# Altium PCB PCB.PcbDoc
Units mil, origin at the board's own origin, x right, y up, seen from the top; angles counter-clockwise.
Board outline 1320 x 535 mil, 2 copper layers (Top Layer, Bottom Layer); 13 components, 8 nets, 35 pads, 11 vias.
Unrouted connection lines stored in the file: 1.
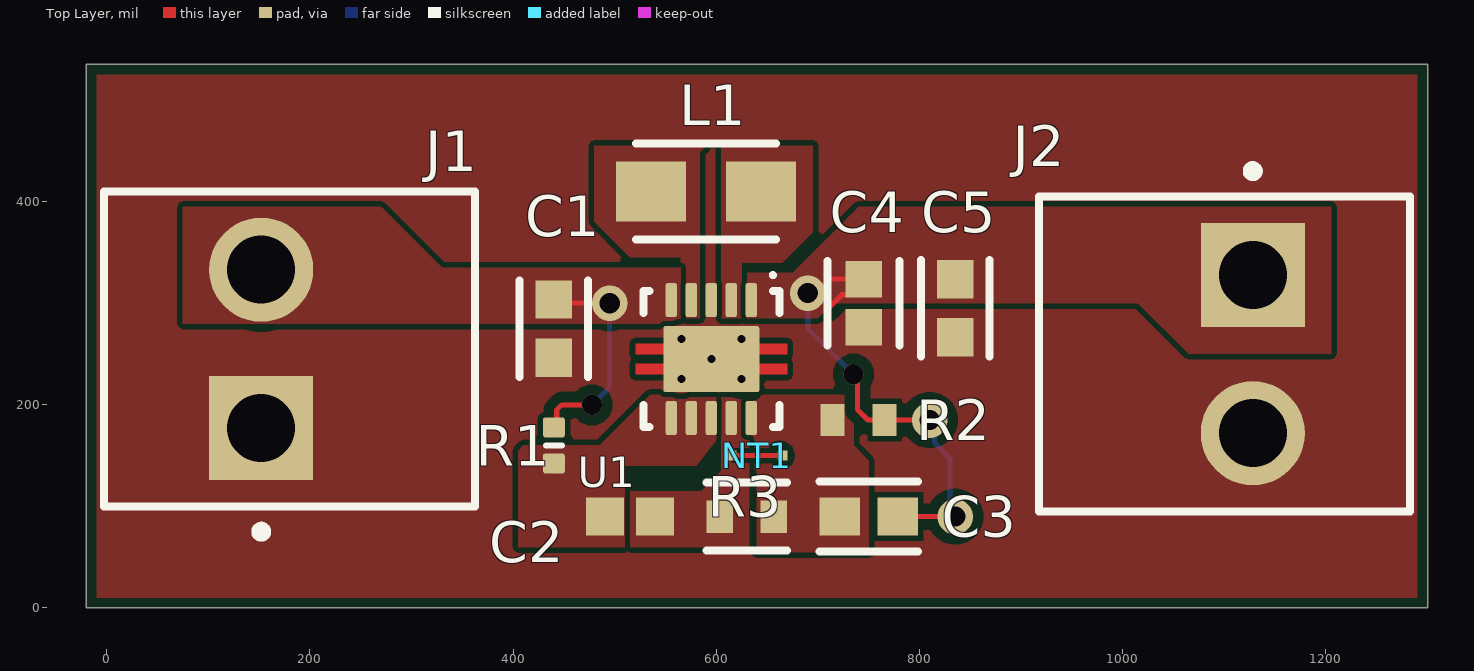
[diagram p0: Top Layer view]
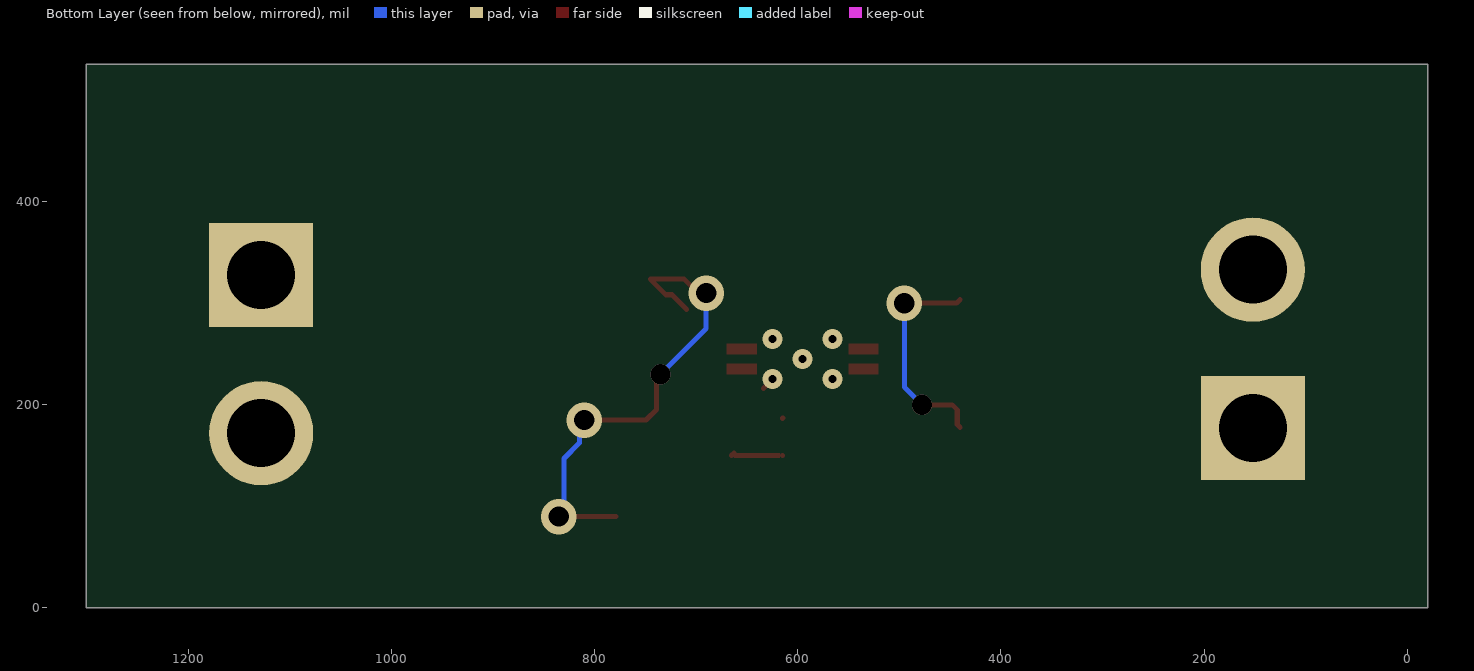
[diagram p1: Bottom Layer view, seen from below]
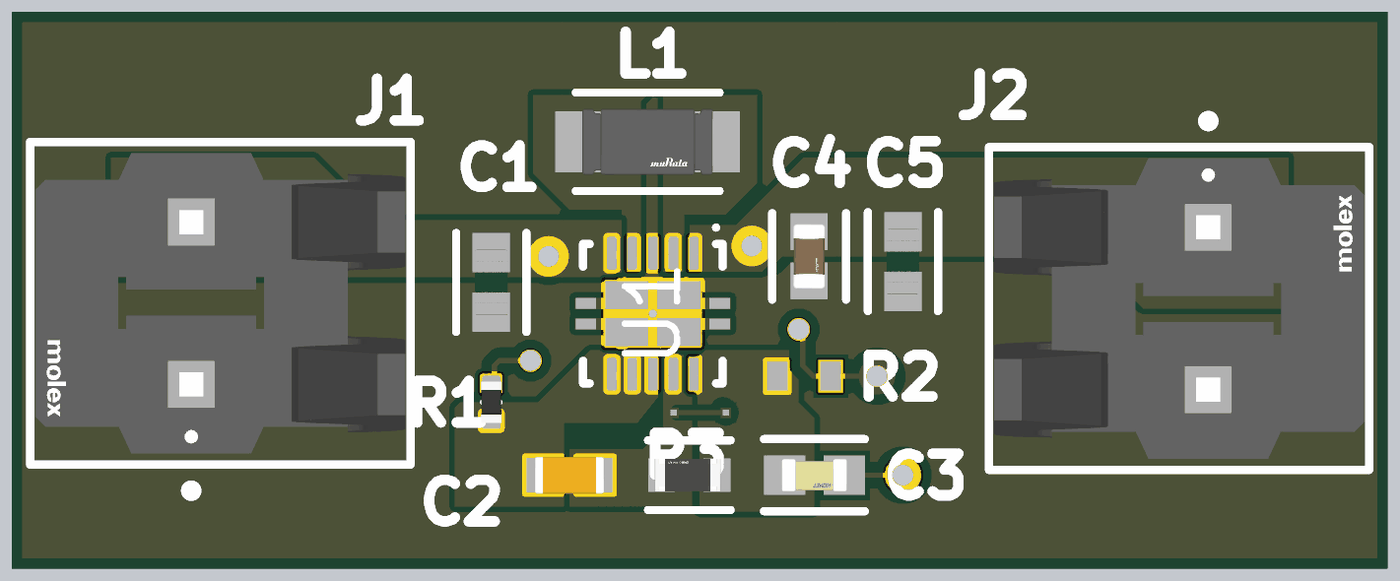
[diagram p2: 3D render of the assembled board from above, using the file's embedded part models]

## Layer stack, top to bottom
Top Solder: solder mask 0.4, Solder Resist, Dk 3.5
Top Layer: signal copper 1.4
Dielectric 1: dielectric 12.6, FR-4, Dk 4.8
Bottom Layer: signal copper 1.4
Bottom Solder: solder mask 0.4, Solder Resist, Dk 3.5

## Board outline
-20,0 1300,0 1300,535 -20,535

## Design rules (kind name [scope] priority, off if disabled: settings)
BoardOutlineClearance [All] p1: gap=9.84 ignorepadtopadclearanceinfootprint=FALSE
Clearance [All] p1: gap=10 ignorepadtopadclearanceinfootprint=FALSE except(0: Arc-Hole Track-Hole SMDPad-Hole THPad-Hole Via-Hole Fill-Hole Poly-Hole Region-Hole Text-Hole; 5: SMDPad-SMDPad SMDPad-Poly Fill-Poly Poly-Poly Poly-Region)
Clearance Clearance_Samenet [All] p2: gap=0 ignorepadtopadclearanceinfootprint=FALSE
MinimumSolderMaskSliver [All] p1: minsoldermaskwidth=2
PasteMaskExpansion [All] p1: expansion=-2
PolygonConnect [All] p1: connectstyle=Direct reliefconductorwidth=10 reliefentries=4 polygonreliefangle="90 Angle" airgapwidth=10
RoutingVias [All] p1: holewidth=20 width=35 viastyle="Through Hole" minholewidth=5 minwidth=15 maxholewidth=28 maxwidth=50
SilkToSilkClearance [All] p1: silktosilkclearance=0
SilkToSolderMaskClearance [IsPad] p1: minsilkscreentomaskgap=2 clearancetoexposedcopper=TRUE
SolderMaskExpansion [All] p1: expansion=2 istentingtop=FALSE
Width [All] p1: maxlimit=10 minlimit=5 preferedwidth=10
26 further rules are at their usual default settings.

## Components (designator, comment, footprint, x,y, rotation, side; value= is the part's Value field where it differs from the comment)
C1 "CL10A106MQ8NNNC" FP-CL10-IPC_B 440,275 r270 top value=10uF
C2 "Capacitor 100 nF +/-10% 50 V 0603" CAPC1608X90X40NL10T20 515,90 r0 top value=100nF
C3 "C0603C229C5GACTU" FP-C0603C-CF-IPC_B 750,90 r180 top value=2.2pF
C4 "GRM188R61A226ME15D" FP-GRM188-0_2-IPC_C 745,300 r270 top value=22uF
C5 "CL10A106MQ8NNNC" FP-CL10-IPC_B 835,295 r270 top value=10uF
J1 "26-48-1025" FP-26-48-1025-MFG 180,255 r270 top
J2 "26-48-1025" FP-26-48-1025-MFG 1100,250 r90 top
L1 "LQH31CN2R2M03L" FP-LQH31CN_03-MFG 590,410 r0 top value=2.2uH
NT1 "Net_tie" Net_tie-Footprint-1 640,150 r0 top net-tie
R1 "Resistor 100R +/-1 % 0402 63 mW" RESC0402(1005)_L 440,160 r270 top value=100
R2 "RC0603FR-071ML" RESC1608X55X25LL10T15 740,185 r0 top value=1MR
R3 "RT0603DRD07178KL" FP-RT0603-IPC_C 630,90 r180 top value=178kR
U1 "TPS63000DRCR" DRC0010J_V 595,245 r270 top

## Footprints (in the part's own frame and the unit in brackets; to place one, negate y for a bottom-side part, rotate by r counter-clockwise, add the part's x,y. Pads: shape width x height; smd on the part's side, far side on the other; paste and mask are expansions set on the pad)
CAPC1608X90X40NL10T20 [mm] "Chip Capacitor, 2-Leads, Body 1.70x0.90mm, IPC Medium Density"
  rect 0.95x0.95 smd: 1(-0.625,0) 2(0.625,0)
  body extent -0.85,-0.45 0.85,0.45, height 0.9
DRC0010J_V [mm] "SON, 10-Leads, Body 3x3mm, Pitch 0.5mm, Thermal Pad 2.4x1.65mm, TI Recommended"
  rrect36% 0.85x0.28 smd paste-0.025 mask+0.07: 1(-1.475,1) 2(-1.475,0.5) 3(-1.475,0) 4(-1.475,-0.5) 5(-1.475,-1) 6(1.475,-1) 7(1.475,-0.5) 8(1.475,0) 9(1.475,0.5) 10(1.475,1)
  rrect6% 1.65x2.4 smd paste-0.825 mask+0.07: 11(0,0)
  Top Layer region: -0.39,-1.9 -0.11,-1.9 -0.11,-1.143 -0.39,-1.143
  Top Layer region: 0.39,-1.143 0.11,-1.143 0.11,-1.9 0.39,-1.9
  Top Layer region: 0.39,1.9 0.11,1.9 0.11,1.143 0.39,1.143
  Top Layer region: -0.39,1.143 -0.11,1.143 -0.11,1.9 -0.39,1.9
  silkscreen extent -2.15,-1.7 1.7,1.7, body extent -1.55,-1.55 1.55,1.55, height 1
FP-26-48-1025-MFG [mm]
  rect 2.6x2.6 hole 1.7 paste-1000 mask+0: 1(1.98,-0.71)
  round 2.6 hole 1.7 paste-1000 mask+0: 2(-1.98,-0.71)
  silkscreen extent -3.94,-4.63 4.69,4.63, body extent -4.04,-4.73 4.04,4.73, height 0.25
FP-C0603C-CF-IPC_B [mil]
  rect 39.63x37.73 smd paste+0 mask+0: 1(-28.58,0) 2(28.58,0)
  silkscreen extent -48,-35 48,35, body extent -58,-29 58,29, height 10
FP-CL10-IPC_B [mil]
  rect 37.72x35.91 smd paste+0 mask+0: 1(-28.62,0) 2(28.62,0)
  silkscreen extent -47,-34 47,34, body extent -57,-28 57,28, height 10
FP-GRM188-0_2-IPC_C [mil]
  rect 35.63x35.68 smd paste+0 mask+0: 1(-23.64,0) 2(23.64,0)
  silkscreen extent -41,-35 41,35, body extent -45,-24 45,24, height 10
FP-LQH31CN_03-MFG [mm]
  rect 1.75x1.5 smd paste+0 mask+0: 1(-1.375,0) 2(1.375,0)
  silkscreen extent -1.75,-1.2 1.75,1.2, body extent -2.35,-1 2.35,1, height 0.25
FP-RT0603-IPC_C [mil]
  rect 25.93x31.97 smd paste+0 mask+0: 1(-26.64,0) 2(26.64,0)
  silkscreen extent -40,-33 40,33, body extent -44,-22 44,22, height 10
Net_tie-Footprint-1 [mil]
  rect 10x10 smd mask-393.7: 1(-25,0) 2(25,0)
  Top Layer region: -22.5,-2.5 22.5,-2.5 22.5,2.5 -22.5,2.5
RESC0402(1005)_L [mm] "Chip Resistor, Body 1.0x0.5mm, IPC High Density"
  rrect25% 0.5x0.55 smd: 1(-0.45,0) 2(0.45,0)
  silkscreen extent 0,-0.2 0,0.2, body extent -0.5,-0.25 0.5,0.25, height 0.3
RESC1608X55X25LL10T15 [mm] "Chip Resistor, 2-Leads, Body 1.70x0.90mm, IPC High Density"
  rect 0.6x0.8 smd: 1(-0.65,0) 2(0.65,0)
  body extent -0.85,-0.45 0.85,0.45, height 0.55

## Part data
C1 C5: library part CMP-001-00083-1, "Ceramic capacitor SMD-0603 10uF /6.3V X5R# M +-20%, Samsung, RoHS", Case Code (Imperial)=0603, Case Code (Metric)=1608, Dielectric=X5R, Max Operating Temperature=85°C, Min Operating Temperature=-55°C, Package Quantity=1, Tolerance=20%, Voltage=6.3V, Case/Package=0603, Construction=Flat, Contact Plating=Tin, Depth=0.8mm, Height=0.8mm, Length=1.6mm, Mounting Technology="Surface Mount", Packaging="Tape and Reel", Radiation Hardening=No, RoHS Compliant=Yes, Series=CL, Thickness=0.035inch, Voltage Rating=6.3V, Width=0.031inch
C2: library part CMP-001-00017-6, "Chip Capacitor, 100 nF, +/- 10%, 50 V, 0603 (1608 Metric)", Capacitor Type=Ceramic, Case/Package=0603, Max Operating Temperature=125°C, Min Operating Temperature=-55°C, Tolerance=10%, Voltage Rating=50V, Mounting Technology=SM, Pins=2, RoHS Compliant=True
C3: library part CMP-001-00087-1, "Ceramic Capacitor 2.2PF 50V, C0G, 0.25PF, 0603, Full Reel", Case Code (Imperial)=0603, Case Code (Metric)=1608, Dielectric=C0G, Dielectric Material=Ceramic, Max Operating Temperature=125°C, Min Operating Temperature=-55°C, Package Quantity=4000, Temperature Coefficient=30ppm/°C, Voltage=50V, Case/Package=0603, Construction=Flat, Contact Plating=Tin,Matte, Depth=0.8mm, Dissipation Factor=0.1%, Height=0.8mm, Lead Pitch=0.7mm, Length=1.6mm, Mounting Technology="Surface Mount", Packaging="Tape and Reel", Pins=2, Reach SVHC Compliant=No, Series="SMD Comm C0G", Termination=SMD/SMT, Thickness=0.034inch, Voltage Rating=50V, Voltage Rating (DC)=50V, Width=0.8mm
C4: library part CMP-001-00085-1, "0603 22 uF 10 V ±20% Tolerance X5R Multilayer Ceramic Chip Capacitor", Case Code (Imperial)=0603, Case Code (Metric)=1608, Dielectric=X5R, Max Operating Temperature=85°C, Min Operating Temperature=-55°C, Package Quantity=4000, Tolerance=20%, Voltage Rating=10V, Case/Package=0603, Depth=0.8mm, Height=0.8mm, Lead Free="Lead Free", Length=1.6mm, Material=Ceramic, Mounting Technology="Surface Mount", Packaging="Cut Tape", Reach SVHC Compliant=Yes, RoHS Compliant=Yes, Series=GRM, Termination=SMD/SMT, Thickness=0.039inch, Voltage Rating (DC)=10V, Weight=0.000222oz, Width=0.8mm
J1 J2: library part CMP-002-00071-1, "KK 396 Breakaway Header, Vertical, Square Pin, with Friction Lock, 2 Circuits, Tin (Sn) Plating", Color=Black, Contact Resistance=10mR, Current Rating=7A, Flammability Rating="UL94 V-0", Max Current Rating=6A, Max Operating Temperature=75°C, Min Operating Temperature=0°C, Package Quantity=100, Voltage Rating=250V, Approvals=UL,CSA,TUV, Connector Type="Male Pin", Contact Material=Brass, Contact Mating Length=0.45inch, Contact Plating=Tin,Copper, Contact Type="Male Pin", Depth=9.02mm, Fastening Type=Friction, Gender=Male, Height=12.8mm, Housing Color=Black, Housing Material=Polyester, Lead Pitch=3.96mm, Length=7.87mm, Mounting Technology="Through Hole", Number of Contacts=2, Number of Positions=2, Number of Rows=1, Orientation=Straight, Packaging=Bulk, Pitch=3.96mm, Radiation Hardening=No, RoHS Compliant=Yes, Series="KK® 41671", Termination=Solder, Voltage Rating (AC)=250V
L1: library part CMP-006-00022-1, "Ind Power Chip Unshielded Wirewound 2.2uH 20% 1MHz Ferrite 430mA 1206 Embossed T/R", Case Code (Imperial)=1206, Current Rating=430mA, DC Resistance (DCR)=533mR, Inductance Tolerance=20%, Max Operating Temperature=85°C, Min Operating Temperature=-40°C, Package Quantity=2000, Self Resonant Frequency=50MHz, Test Frequency=1MHz, Core Material=Ferrite, DC Current=430mA, Depth=1.8mm, Height=1.8mm, Height - Seated (Max)=0.079inch, Length=3.2mm, Max DC Current=430mA, Military Standard=Not, Mounting Technology="Surface Mount", Packaging="Tape and Reel", Radiation Hardening=No, Reach SVHC Compliant=No, Series=LQH31C, Shielding=Unshielded, Termination=SMD/SMT, Tolerance=20%, Weight=0.001023oz, Width=0.063inch
NT1: library part CMP-019-00050-3
R1: library part CMP-009-00167-3, "Chip Resistor, 100 Ohms, +/-1 %, 63 mW, -55 to 155 degC, 0402", Case/Package=0402, Max Operating Temperature=155°C, Min Operating Temperature=-55°C, Power=63mW, Tolerance=1%, Pins=2
R2: library part CMP-009-00177-1, "Res Thick Film 0603 1M Ohm 1% 1/10W ±100ppm/°C Molded SMD Paper T/R", Case Code (Imperial)=0603, Case Code (Metric)=1608, Max Operating Temperature=155°C, Min Operating Temperature=-55°C, Package Quantity=5000, Power Rating=100mW, Resistor Type="Thick Film", Temperature Coefficient=100ppm/°C, Tolerance=1%, Voltage Rating=75V, Voltage Rating (DC)=50V, Case/Package=0603, Depth=0.8mm, Height=0.45mm, Lead Free="Lead Free", Length=1.6mm, Military Standard=Not, Packaging="Cut Tape", Pins=2, Reach SVHC Compliant=Yes, RoHS Compliant=Yes, Series=RC, Technology="THICK FILM", Termination=SMD/SMT, Type="General Purpose", Weight=0.000847oz, Width=0.8mm
R3: library part CMP-009-00178-1, "Res Thin Film 0603 178K Ohm 0.5% 1/10W ±25ppm/°C Molded SMD Paper T/R", Case Code (Imperial)=0603, Case Code (Metric)=1608, Max Operating Temperature=155°C, Max Power Dissipation=100mW, Min Operating Temperature=-55°C, Package Quantity=1, Resistor Type="Thin Film", Temperature Coefficient=25ppm/°C, Tolerance=0.5%, Voltage Rating (DC)=50V, Case/Package=0603, Features="Moisture Resistant", Height=0.022inch, Lead Free="Lead Free", Length=0.063inch, Number of Terminations=2, Packaging="Cut Tape", Power Rating=100mW, RoHS Compliant=Yes, Series=RT, Width=0.031inch
U1: library part CMP-019-00049-2, "Buck-Boost Switching Regulator IC Positive Adjustable 1.2V 1 Output 1.6A (Switch) 10-VFDFN Exposed Pad", Case/Package=VSON, Max Operating Temperature=85°C, Max Output current=1.2A, Max Output Voltage=5.5V, Min Input Voltage=1.8V, Min Operating Temperature=-40°C, Min Output Voltage=1.2V, Package Quantity=1, Quiescent Current=40uA, Switching Frequency=1.5MHz, Efficiency=96%, Max Supply Voltage=5.5V, Number of Outputs=1, Operating Supply Voltage=5.5V, Output Current=1.2A, Output Type=Adjustable, Output Voltage=5.5V, Pins=10, Reach SVHC Compliant=Yes, RoHS Compliant=Yes, Synchronous Rectifier=Yes, Topology=Buck-Boost

## Via types
v1: diameter 19.68, hole 7.87, Top Layer to Bottom Layer, 5 vias
v2: diameter 35, hole 20, Top Layer to Bottom Layer, 4 vias
v3: diameter 20, hole 20, Top Layer to Bottom Layer, 2 vias

## Nets (pads, with @x,y where several pads share a name; then routed paths per layer and width w, separated by ;. In a path a pad name is that pad's centre, name@x,y a point inside that pad or via, vN(x,y) a via of type N, cw(c..) or ccw(c..) an arc to the next point about the centre after c; other vN are vias at no path point)
FB: C3.2 R2.1 R3.1 U1.10
GND: C2.2 NT1.1 R3.2 U1.9 | length 0.4
  Top Layer w5: U1.9 U1.9@614.84,186.77 ; NT1.1@614.84,150.16 NT1.1
L1: L1.1 U1.4
L2: L1.2 U1.2
PGND: C1.2 C4.2 C5.2 J1.1 J2.2 NT1.2 U1.3 U1.11 | length 16.5
  Top Layer w5: v1(624.53,225.32) U1.11@633.68,216.16 ; NT1.2@662.5,152.5 NT1.2
  other v1: 565.47,225.32 595,245 565.47,264.68 624.53,264.68
VIN: C1.1 J1.2 R1.1 U1.5 | length 218.9
  Top Layer w5: R1.1 442.93,180.65 442.93,195 447.88,199.96 v3(477.55,199.96) ; C1.1 443.62,300 v2(495,300)
  Bottom Layer w5: v3(477.55,199.96) 495,217.4 v2(495,300)
VINA: C2.1 R1.2 U1.6 U1.7 U1.8
VOUT: C3.1 C4.1 C5.1 J2.1 R2.2 U1.1 | length 480.8
  Top Layer w5: v2(690,310) 698.07,310 711.71,323.64 C4.1 729.68,308.33 723.64,308.33 709.31,294 ; v3(735,230) 738.72,226.28 738.72,195.46 749.21,184.97 R2.2 ; R2.2 v2(810,185) ; C3.1 v2(835,90)
  Bottom Layer w5: v2(690,310) 690,275 v3(735,230) ; v2(810,185) 814.85,180.15 814.85,162.3 830,147.15 830,95 v2(835,90)

## Polygon pours and split planes (outlines as drawn)
PGND on Top Layer "PGND_L01_P008" (solid, pour order 8): -18.96,0.56 -18.4,0 1300,0 1300,535 -20,535 -20,0
FB on Top Layer "FB_L01_P006" (solid, pour order 6): 625,210 625,150 640,135 640,55 750,55 750,145 735,160 735,210
VOUT on Top Layer "VOUT_L01_P005" (solid, pour order 5): 625,285 700,285 715,300 1015,300 1065,250 1205,250 1205,395 740,395 675,330 625,330
GND on Top Layer "GND_L01_P004" (solid, pour order 4): 604,208.48 605.52,210 632.5,210 632.5,60 515,60 515,115 585,115 605,135 605,210
VINA on Top Layer "VINA_L01_P003" (solid, pour order 3): 600,210 600,165 580,140 510,140 510,60 405,60 405,155 410,160 485,160 535,210
L2 on Top Layer "L2_L01_P002" (solid, pour order 2): 605,285 605,455 695,455 695,370 665,340 625,340 625,285
L1 on Top Layer "L1_L01_P001" (solid, pour order 1): 565,285 565,345 515,345 480,380 480,455 590,455 583.52,448.52 583.52,285
VIN on Top Layer "VIN_L01_P000" (solid, pour order 0): 75,280 565,280 565,335 560,335 330,335 270,395 75,395